# EAGLE board Sensor_Board_2.01_HX711_DS18b2 (EAGLE 9.6.2)
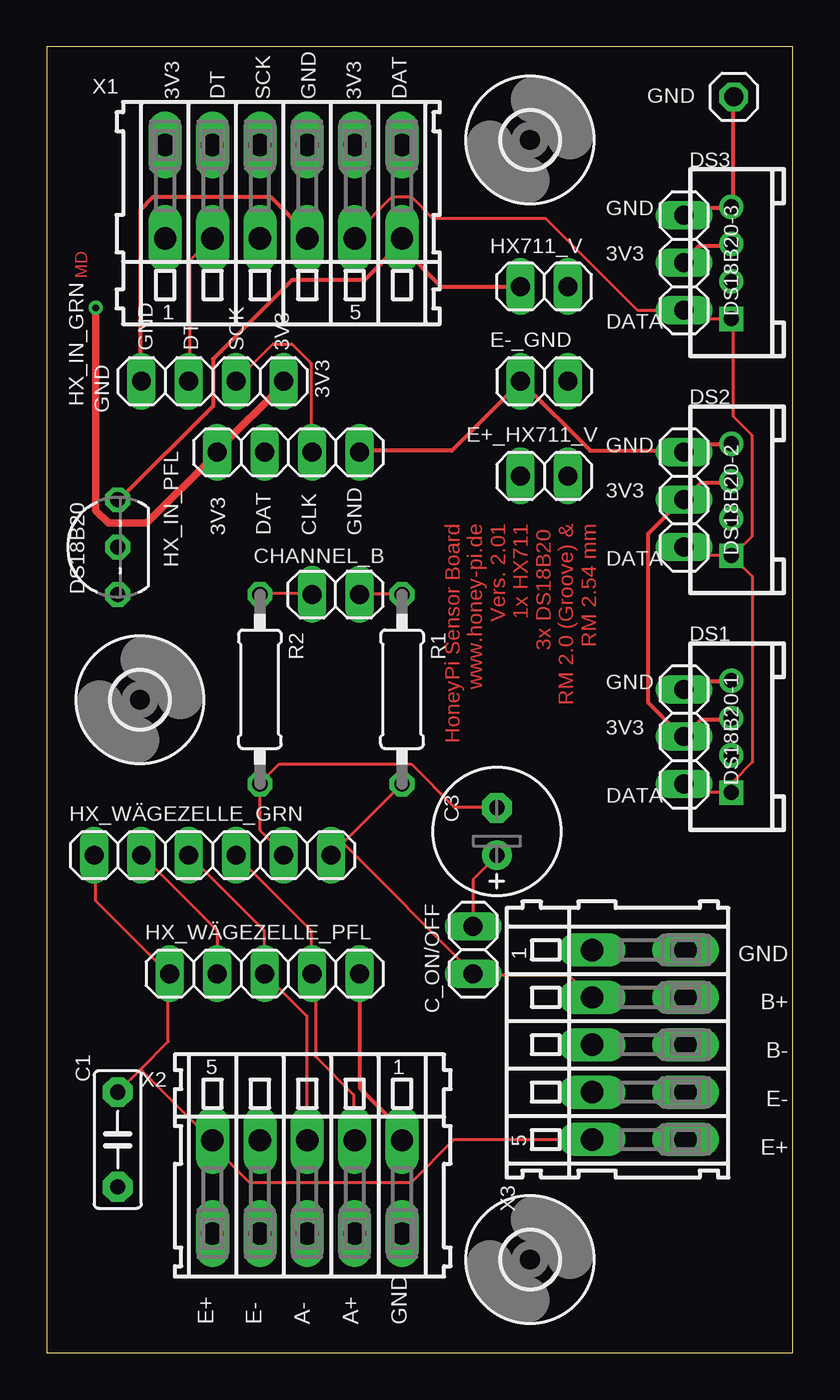
[diagram p0: board, top side]
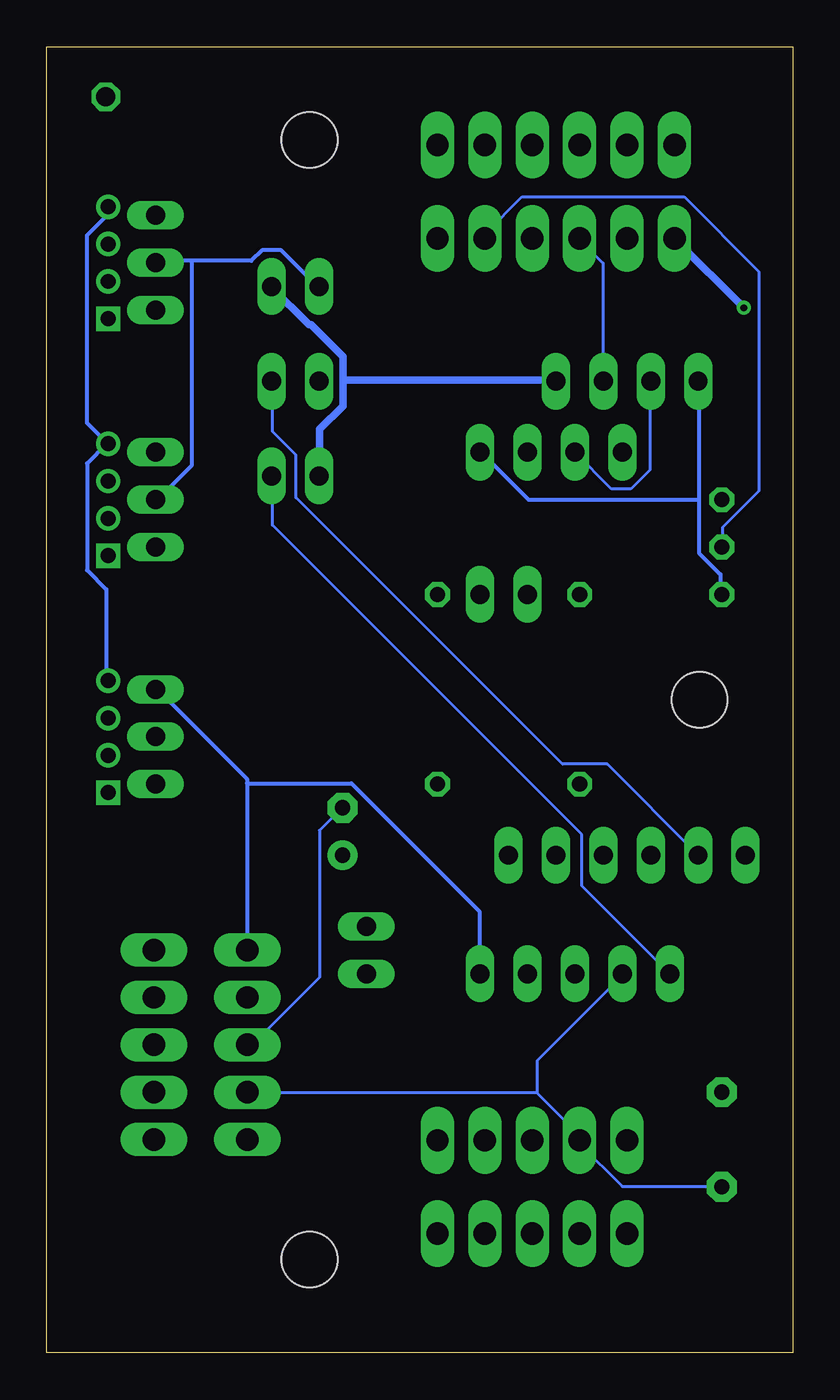
[diagram p1: board, bottom side, seen from below]

Size 40 x 70 mm. Coordinates in mm from the lower left corner, seen from the top.
Outline: 0,0 40,0 40,70 0,70 0,0
Copper layers (1*16): Top 0.035mm / dielectric 1.5mm / Bottom 0.035mm
Design rules "default *": minimum track width 6mil, minimum drill 0.35mm, track to track 6mil, track to pad 6mil, pad to pad 6mil, via to via 6mil, smd to smd 6mil, copper to edge 40mil, drill to drill 1mm, minimum pad ring 10mil, minimum via ring 8mil, stop-mask expansion 4mil, vias tented up to drill 0mil, thermal gap 10mil
Net classes: 0 Signal: width 0.152 mm, clearance 0.305 mm; 1 Supply3v3: width 0.203 mm, clearance 0.305 mm; 2 Supply5v: width 0.406 mm, clearance 0.305 mm

## Footprints (pad centres in the part's own frame; a part is rotated, then mirrored left to right if it is on the bottom)
C5B2.5 = drill 0.813 pad 1.6 octagon: 1 -2.54,0; 2 2.54,0
E2,5-7 = drill 0.813 pad 1.6: + -1.27,0 | drill 0.813 pad 1.6 octagon: - 1.27,0
1X02 = drill 1.016 long: 1 -1.27,0; 2 1.27,0
4P-2.0 = drill 0.8 pad 1.27 square: 1 -3,0 | drill 0.8 pad 1.27: 2 -1,0; 3 1,0; 4 3,0
TO92- = drill 0.813 octagon: 1 -2.54,0; 2 0,0; 3 2.54,0
1X03 = drill 1.016 long: 1 -2.54,0; 2 0,0; 3 2.54,0
1X01 = drill 1.016 octagon: 1 0,0
1X04 = drill 1.016 long: 1 -3.81,0; 2 -1.27,0; 3 1.27,0; 4 3.81,0
1X06 = drill 1.016 long: 1 -6.35,0; 2 -3.81,0; 3 -1.27,0; 4 1.27,0; 5 3.81,0; 6 6.35,0
1X05 = drill 1.016 long: 1 -5.08,0; 2 -2.54,0; 3 0,0; 4 2.54,0; 5 5.08,0
0207/10 = drill 0.813 octagon: 1 -5.08,0; 2 5.08,0
3,0 = hole 3: 0,0
233-506 = drill 1.2 long: A1 -6.35,2.5; A2 -3.81,2.5; A3 -1.27,2.5; A4 1.27,2.5; A5 3.81,2.5; A6 6.35,2.5; B1 -6.35,-2.5; B2 -3.81,-2.5; B3 -1.27,-2.5; B4 1.27,-2.5; B5 3.81,-2.5; B6 6.35,-2.5
233-505 = drill 1.2 long: A1 -5.08,2.5; A2 -2.54,2.5; A3 0,2.5; A4 2.54,2.5; A5 5.08,2.5; B1 -5.08,-2.5; B2 -2.54,-2.5; B3 0,-2.5; B4 2.54,-2.5; B5 5.08,-2.5

## Placement (x,y rotation side)
C1  10µF  [C5B2.5]  3.81,11.43 270 top
C3  0,1µF  [E2,5-7]  24.13,27.94 90 top
C_ON/OFF  [1X02]  22.86,21.59 270 top
CHANNEL_B  [1X02]  15.49,40.64 180 top
DS1  [4P-2.0]  36.7,33.02 90 top
DS2  [4P-2.0]  36.7,45.72 90 top
DS3  [4P-2.0]  36.7,58.42 90 top
DS18B20  DS2405  [TO92-]  3.81,43.18 90 top
DS18B20-1  [1X03]  34.16,33.02 90 top
DS18B20-2  [1X03]  34.16,45.72 90 top
DS18B20-3  [1X03]  34.16,58.42 90 top
E+_HX711_V  [1X02]  26.67,46.99 0 top
E-_GND  [1X02]  26.67,52.07 0 top
GND  [1X01]  36.83,67.31 0 top
HX711_V  [1X02]  26.67,57.15 180 top
HX_IN_GRN  [1X04]  8.89,52.07 0 top
HX_IN_PFL  [1X04]  12.95,48.26 0 top
HX_WÄGEZELLE_GRN  [1X06]  8.89,26.67 0 top
HX_WÄGEZELLE_PFL  [1X05]  11.68,20.32 0 top
R1  100Ohm  [0207/10]  19.05,35.56 270 top
R2  100Ohm  [0207/10]  11.43,35.56 270 top
U$1  [3,0]  25.91,5 0 top
U$2  [3,0]  25.91,65 0 top
U$5  [3,0]  5,35 0 top
X1  [233-506]  12.7,62.23 0 top
X2  [233-505]  13.97,8.89 180 top
X3  [233-505]  31.75,16.51 270 top

## Library data of the parts
C1 = capacitor-wima
C3 = rcl; SPICEPREFIX: C
C_ON/OFF CHANNEL_B DS18B20-1-DS18B20-3 E+_HX711_V E-_GND GND HX711_V HX_IN_GRN HX_IN_PFL HX_WÄGEZELLE_GRN HX_WÄGEZELLE_PFL = pinhead
DS1-DS3 = Connector
DS18B20 = maxim; MF: DALLAS SEMICONDUCTOR; MPN: DS2405; OC_FARNELL: 1188025; OC_NEWARK: 06F4645
R1 R2 = rcl; SPICEPREFIX: R
U$1 U$2 U$5 = holes
X1 = con-wago; MF: Wago Corporation; MPN: 0233-0506; OC_FARNELL: 1777100; OC_NEWARK: 79K2052
X2 X3 = con-wago; MF: Wago Corporation; MPN: 0233-0505; OC_FARNELL: unknown; OC_NEWARK: 79K2051

## Nets
3V3 [Supply3v3]: DS1.3 DS2.3 DS3.3 DS18B20-1.2 DS18B20-2.2 DS18B20-3.2 DS18B20.3 HX711_V.2 X1.B6
A+: HX_WÄGEZELLE_GRN.4 HX_WÄGEZELLE_PFL.4 X2.B2
A-: HX_WÄGEZELLE_GRN.3 HX_WÄGEZELLE_PFL.3 X2.B3
B+: C_ON/OFF.2 HX_WÄGEZELLE_GRN.6 R1.2 X3.B2
B-: C3.- HX_WÄGEZELLE_GRN.5 R2.2 X3.B3
DS18B20_DATA_GPIO11_PIN23: DS1.1 DS2.1 DS3.1 DS18B20-1.1 DS18B20-2.1 DS18B20-3.1 DS18B20.2 X1.B5
E+: C1.1 E+_HX711_V.2 HX_WÄGEZELLE_GRN.1 HX_WÄGEZELLE_PFL.1 X2.B5 X3.B5
E-: C1.2 E-_GND.2 HX_WÄGEZELLE_GRN.2 HX_WÄGEZELLE_PFL.2 X2.B4 X3.B4
GND [Supply3v3]: DS1.4 DS2.4 DS3.4 DS18B20-1.3 DS18B20-2.3 DS18B20-3.3 DS18B20.1 E-_GND.1 GND.1 HX_IN_GRN.1 HX_IN_PFL.4 HX_WÄGEZELLE_PFL.5 X1.B4 X2.B1 X3.B1
HX711-DT: HX_IN_GRN.2 HX_IN_PFL.2 X1.B2
HX711-SCK: HX_IN_GRN.3 HX_IN_PFL.3 X1.B3
HX711_V [Supply5v]: E+_HX711_V.1 HX711_V.1 HX_IN_GRN.4 HX_IN_PFL.1 X1.B1
N$1: CHANNEL_B.1 R1.1
N$2: CHANNEL_B.2 R2.1
N$3: C3.+ C_ON/OFF.1

## Tracks (layer width: path | path; a pad name or v marks a point on that pad's centre or on a via)
3V3
  Top 0.203: DS1.3 36.69,33.95 35.09,33.95 DS18B20-1.2 34.06,33.03 32.23,34.86 32.23,43.89 34.06,45.72 DS18B20-2.2 34.18,45.72 35.09,46.63 36.69,46.63 DS2.3 | DS3.3 36.69,59.32 34.98,59.32 34.18,58.52 DS18B20-3.2 | DS18B20.3 3.89,45.72 8.91,50.75 8.91,53.26 13.14,57.49 17.03,57.49 18.97,59.44 18.97,59.66 X1.B6 18.97,59.32 21.14,57.15 HX711_V.2
  Bottom 0.203: 32.23,58.52 29.03,58.52 28.46,59.09 27.43,59.09 25.49,57.15 HX711_V.2 | 32.23,58.52 34.06,58.52 DS18B20-3.2 | 32.23,58.52 32.23,47.55 34.06,45.72 DS18B20-2.2
A+
  Top 0.152: HX_WÄGEZELLE_GRN.4 10.17,26.63 14.17,22.63 14.17,20.34 HX_WÄGEZELLE_PFL.4 14.29,20.23 14.4,20.12 14.4,15.89 16.46,13.83 16.46,11.43 X2.B2
A-
  Top 0.152: HX_WÄGEZELLE_GRN.3 11.66,22.63 11.66,20.34 HX_WÄGEZELLE_PFL.3 13.95,18.06 13.95,11.43 X2.B3
B+
  Top 0.152: 15.89,27.32 HX_WÄGEZELLE_GRN.6 15.32,26.75 | 15.89,27.32 R1.2 | X3.B2 29.15,19.09 28,20.23 22.86,20.23 C_ON/OFF.2 22.86,20.34 15.89,27.32
B-
  Top 0.152: HX_WÄGEZELLE_GRN.5 12.69,26.75 11.43,28 R2.2 11.43,30.52 12.46,31.55 19.55,31.55 21.83,29.26 24.12,29.26 C3.-
  Bottom 0.152: X3.B3 29.15,16.57 28.92,16.57 25.38,20.12 25.38,28 24.23,29.15 C3.-
DS18B20_DATA_GPIO11_PIN23
  Top 0.152: DS18B20-1.1 34.18,30.4 34.52,30.06 36.69,30.06 DS1.1 36.8,30.06 36.8,30.63 37.83,31.66 37.83,41.6 36.8,42.63 DS2.1 | DS2.1 36.69,42.75 34.52,42.75 34.18,43.09 DS18B20-2.1 | DS2.1 36.8,42.75 37.83,43.78 37.83,49.15 36.8,50.18 36.8,55.32 DS3.1 36.69,55.44 34.52,55.44 34.18,55.78 DS18B20-3.1 34.06,55.89 31.66,55.89 26.75,60.81 20.69,60.81 19.55,61.95 18.52,61.95 16.57,60.01 16.57,59.78 X1.B5
  Bottom 0.152: DS18B20.2 3.77,43.2 3.77,44.23 1.83,46.18 1.83,57.95 5.83,61.95 14.52,61.95 16.46,60.01 16.46,59.78 X1.B5
E+
  Top 0.152: 5.03,15.2 3.89,14.06 C1.1 | 5.03,15.2 6.51,16.69 6.51,20.23 HX_WÄGEZELLE_PFL.1 6.51,20.34 2.63,24.23 2.63,26.63 HX_WÄGEZELLE_GRN.1 | 5.03,15.2 8.8,11.43 X2.B5 8.91,11.32 8.91,11.09 10.86,9.14 19.55,9.14 21.83,11.43 X3.B5
  Bottom 0.152: HX_WÄGEZELLE_PFL.1 11.32,25.03 11.32,27.77 27.89,44.35 27.89,46.98 E+_HX711_V.2
E-
  Top 0.152: HX_WÄGEZELLE_PFL.2 9.14,22.63 5.14,26.63 HX_WÄGEZELLE_GRN.2
  Bottom 0.152: C1.2 3.89,8.91 9.14,8.91 11.43,11.2 X2.B4 11.43,11.66 13.72,13.95 | 13.72,13.95 29.15,13.95 X3.B4 | E-_GND.2 27.89,52.01 27.89,49.38 26.63,48.12 26.63,45.83 12.34,31.55 9.94,31.55 5.14,26.75 HX_WÄGEZELLE_GRN.2 | 13.72,13.95 13.72,15.66 9.14,20.23 HX_WÄGEZELLE_PFL.2
GND
  Top 0.203: HX_WÄGEZELLE_PFL.5 16.8,20.23 16.8,14.17 18.97,12 18.97,11.43 X2.B1 | DS1.4 36.69,36.01 34.52,36.01 34.18,35.66 DS18B20-1.3 | X1.B4 13.95,59.78 13.95,60.01 12,61.95 5.71,61.95 5.03,61.27 5.03,52.12 HX_IN_GRN.1 | DS18B20-3.3 34.18,61.04 34.52,61.38 36.69,61.38 DS3.4 36.8,61.49 36.8,67.21 GND.1 | DS2.4 36.69,48.69 34.52,48.69 34.18,48.35 DS18B20-2.3 34.06,48.35 29.15,48.35 25.49,52.01 E-_GND.1 25.38,52.01 21.72,48.35 16.8,48.35 HX_IN_PFL.4
  Bottom 0.203: 29.26,30.52 29.26,30.75 34.06,35.55 DS18B20-1.3 | 29.26,30.52 29.26,21.6 X3.B1 | 29.26,30.52 23.66,30.52 16.8,23.66 16.8,20.34 HX_WÄGEZELLE_PFL.5 | 5.03,45.72 5.03,52.01 HX_IN_GRN.1 | 5.03,45.72 5.03,42.86 3.89,41.72 3.89,40.69 DS18B20.1 | DS3.4 36.8,61.38 36.8,60.92 37.83,59.89 37.83,49.84 36.8,48.81 DS2.4 36.8,48.69 37.83,47.66 37.83,41.95 36.8,40.92 36.8,36.12 DS1.4 | 5.03,45.72 14.17,45.72 16.69,48.23 HX_IN_PFL.4
HX711-DT
  Top 0.152: HX_IN_GRN.2 7.66,52.12 7.66,58.52 8.8,59.66 X1.B2
  Bottom 0.152: HX_IN_PFL.2 9.72,46.29 8.69,46.29 7.66,47.32 7.66,52.01 HX_IN_GRN.2
HX711-SCK
  Top 0.152: HX_IN_PFL.3 14.17,48.35 14.17,53.03 13.14,54.06 12.12,54.06 10.17,52.12 HX_IN_GRN.3
  Bottom 0.152: HX_IN_GRN.3 10.17,52.12 10.17,58.41 11.43,59.66 X1.B3
HX711_V  (via drill 0.35)
  Top 0.406: HX_IN_GRN.4 12.8,52.01 9.14,48.35 HX_IN_PFL.1 9.03,48.12 5.37,44.46 3.31,44.46 2.63,45.15 v2.63,56.01
  Bottom 0.406: 24.12,52.12 24.12,53.38 25.83,55.09 25.95,55.09 28,57.15 HX711_V.1 | 24.12,52.12 24.12,50.75 25.38,49.49 25.38,47.09 E+_HX711_V.1 | v2.63,56.01 6.29,59.66 X1.B1 | 24.12,52.12 12.8,52.12 HX_IN_GRN.4
N$1
  Top 0.152: R1.1 18.97,40.69 16.8,40.69 CHANNEL_B.1
N$2
  Top 0.152: R2.1 11.43,40.69 14.17,40.69 CHANNEL_B.2
N$3
  Top 0.152: C_ON/OFF.1 22.86,25.38 24.12,26.63 C3.+

## Text on the board
Top: MD | HoneyPi Sensor Board / www.honey-pi.de / Vers. 2.01 / 1x HX711 / 3x DS18B20 / RM 2.0 (Groove) & / RM 2.54 mm
tNames: 3V3 / / DT / / SCK / / GND / / 3V3 / / DAT | GND / / 3V3 / / / DATA | GND / / DT / / SCK / / 3V3 | GND | 3V3 | 3V3 / / DAT / / CLK / / GND | GND / / 3V3 / / / DATA | GND / / 3V3 / / / DATA | GND / / B+ / / B- / / E- / / E+ | E+ / / E- / / A- / / A+ / / GND